# EAGLE board interstage_B2 (EAGLE 9.6.1)
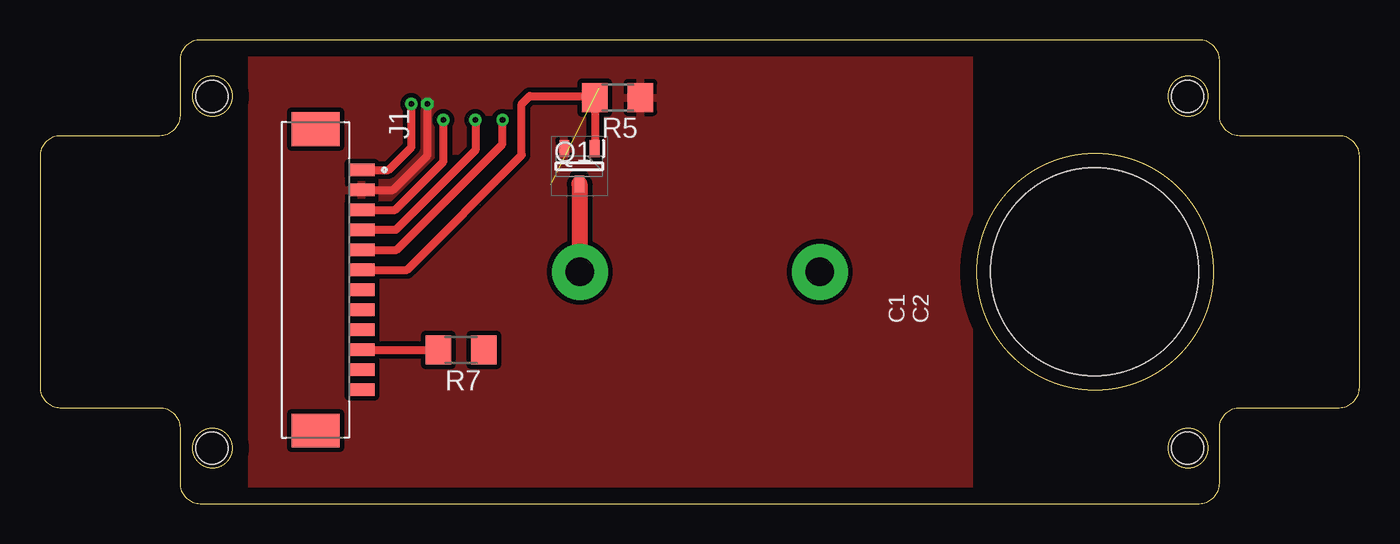
[diagram p0: board, top side]
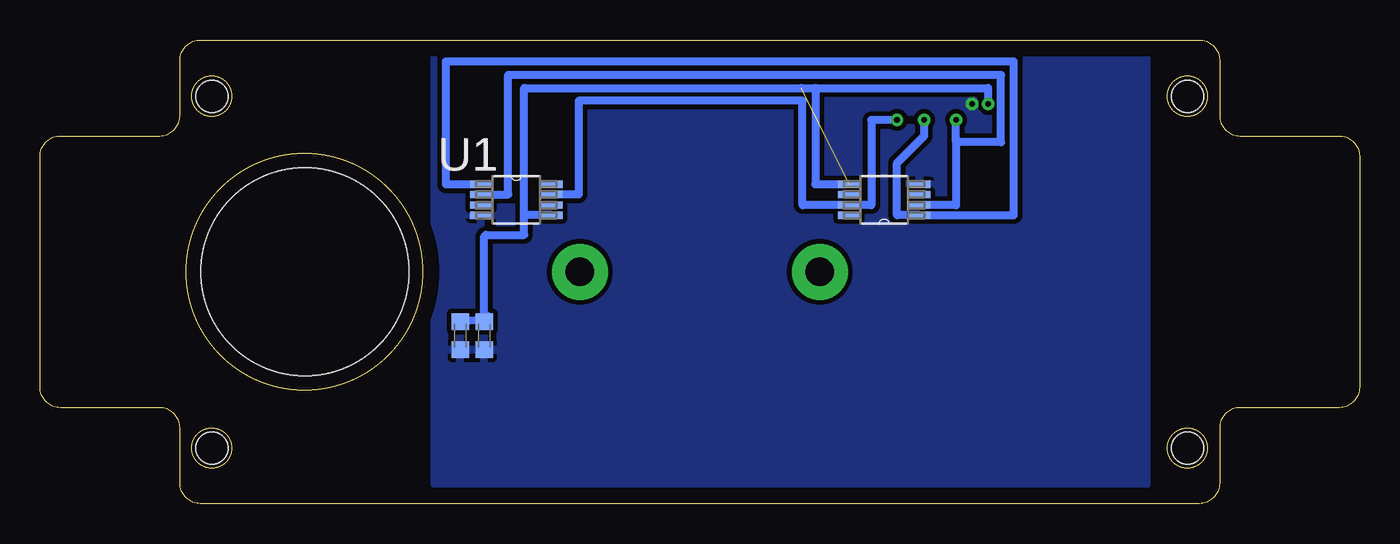
[diagram p1: board, bottom side, seen from below]

Size 82.5 x 29 mm. Coordinates in mm from the lower left corner, seen from the top.
Outline: 0,7.27 arc90 1.27,6 7.48,6 arc-90 8.75,4.73 8.75,1.27 arc90 10.02,0 72.48,0 arc90 73.75,1.27 73.75,4.73 arc-90 75.02,6 81.23,6 arc90 82.5,7.27 82.5,21.73 arc90 81.23,23 75.02,23 arc-90 73.75,24.27 73.75,27.73 arc90 72.48,29 10.02,29 arc90 8.75,27.73 8.75,24.27 arc-90 7.48,23 1.27,23 arc90 0,21.73 0,7.27
Outline: circle at 65.98,14.5 radius 7.4
Outline: circle at 71.78,25.48 radius 1.25
Outline: circle at 10.78,3.48 radius 1.25
Outline: circle at 10.78,25.48 radius 1.25
Outline: circle at 71.78,3.48 radius 1.25
Copper layers (1*16): Top 0.035mm / dielectric 1.5mm / Bottom 0.035mm
Design rules "default *": minimum track width 6mil, minimum drill 0.35mm, track to track 0.3mm, track to pad 6mil, pad to pad 6mil, via to via 6mil, smd to smd 6mil, copper to edge 40mil, drill to drill 6mil, minimum pad ring 10mil, minimum via ring 8mil, stop-mask expansion 4mil, vias tented up to drill 0mil, thermal gap 10mil
Holes 2 mm at 10.75,3.48 10.75,25.48 71.75,3.48 71.75,25.48
Holes 13 mm at 65.95,14.5

## Footprints (pad centres in the part's own frame; a part is rotated, then mirrored left to right if it is on the bottom)
C0603K = smd 1.05 x 1.08: 1 -0.875,0; 2 0.875,0
MOLEX_0532611271 = smd 0.8 x 1.6: 1 -6.875,2.9; 2 -5.625,2.9; 3 -4.375,2.9; 4 -3.125,2.9; 5 -1.875,2.9; 6 -0.625,2.9; 7 0.625,2.9; 8 1.875,2.9; 9 3.125,2.9; 10 4.375,2.9; 11 5.625,2.9; 12 6.875,2.9 | smd 2.1 x 3: S1 -9.425,0; S2 9.425,0
SOT95P230X110-3N = smd 1.05 x 0.6: 1 -1.1,0.95; 2 -1.1,-0.95; 3 1.1,0
R1206 = smd 1.6 x 1.803: 1 -1.422,0; 2 1.422,0
SOP65P490X110-8N = smd 1.372 x 0.457: 1 -2.21,0.965; 2 -2.21,0.33; 3 -2.21,-0.33; 4 -2.21,-0.965; 5 2.21,-0.965; 6 2.21,-0.33; 7 2.21,0.33; 8 2.21,0.965

## Placement (x,y rotation side)
C1  0.1pF  [C0603K]  54.72,10.5 270 bottom
C2  0.1pF  [C0603K]  56.22,10.5 270 bottom
J1  0532611271  [MOLEX_0532611271]  17.22,14 270 top
Q1  PMV16XNR  [SOT95P230X110-3N]  33.72,21.1 270 top
R5  330 Ohm  [R1206]  36.12,25.4 180 top
R7  330 Ohm  [R1206]  26.32,9.6 180 top
U1  LM70CIMM-3  [SOP65P490X110-8N]  52.72,19 0 bottom
U2  LM70CIMM-3  [SOP65P490X110-8N]  29.72,19 180 bottom

## Library data of the parts
C1 C2 = rcl; SPICEPREFIX: C
J1 = picoblade; AVAILABILITY: Unavailable; DESCRIPTION: Picoblade Connector, 12 Circuit Single Row, Right Angle Surface Mount SMT PCB; MF: Molex; MP: 0532611271; PACKAGE: None; PRICE: None
Q1 = SamacSys_Parts; DESCRIPTION: Nexperia PMV16XNR N-channel MOSFET, 8.6 A, 20 V PMV16XN, 3-Pin SOT-23; HEIGHT: 1.1mm; MANUFACTURER_NAME: Nexperia; MANUFACTURER_PART_NUMBER: PMV16XNR; MOUSER_PART_NUMBER: 771-PMV16XNR; MOUSER_PRICE-STOCK: https://www.mouser.com/Search/Refine.aspx?Keyword=771-PMV16XNR
R5 R7 = rcl; SPICEPREFIX: R
U1 U2 = LM70CIMM-3; AVAILABILITY: Unavailable; DESCRIPTION: Temperature Sensor Digital, Local -55°C ~ 150°C 10 b 8-VSSOP; MF: Texas Instruments; MP: LM70CIMM-3/NOPB; PACKAGE: MSOP-8 Texas Instruments; PRICE: None

## Nets
AIN0: J1.8
AIN1: J1.7
GND: C1.2 C2.2 J1.2 Q1.2 R5.1 U1.4 U2.4
INT0: J1.10 R7.2
MISO: J1.4 U1.1 U2.1
MOSFET: Q1.3
MOSI: J1.5 U1.7 U2.7
N$1: R7.1
OC1A: J1.6 Q1.1 R5.2
SCK: J1.3 U1.2 U2.2
T0: J1.11
T1: J1.9
VCC: C1.1 C2.1 J1.1 U1.5 U2.5

## Tracks (layer width: path | path; a pad name or v marks a point on that pad's centre or on a via)
GND  (via drill 0.35)
  Top 0.5: v24.22,25 24.22,21.78 22.07,19.62 J1.2
  pour Bottom: 13.32,28.6 13.32,1.2 57.82,1.2 57.82,28.6
  pour Top: 13.22,28.43 13.22,1.2 13.12,1.1 58.12,1.1 58.12,28.43
INT0
  Top 0.5: J1.10 24.87,9.62 R7.2
MISO  (via drill 0.35)
  Top 0.5: J1.4 22.25,17.12 27.22,22.1 v27.22,24
  Bottom 0.5: v27.22,24 27.22,23 28.92,21.3 28.92,18.04 U2.1 21.62,18.04 21.62,27.65 57.12,27.65 57.12,19.96 U1.1
MOSFET  (via drill 1.8 pad 3.5)
  Top 1: v33.75,14.5 33.75,19.88 Q1.3
MOSI  (via drill 0.35)
  Top 0.5: J1.5 22.3,15.88 28.92,22.5 v28.92,24
  Bottom 0.5: U1.7 48.82,19.33 48.82,25.2 34.82,25.2 34.82,18.67 U2.7 30.52,18.67 30.52,24 v28.92,24
N$2  (via drill 1.8 pad 3.5)
  other vias: 48.75,14.5
OC1A
  Top 0.5: J1.6 22.95,14.62 30.12,21.8 30.12,25 30.62,25.5 34.4,25.5 34.6,25.3 R5.2 34.7,22.23 Q1.1
SCK  (via drill 0.35)  (1 unrouted)
  Top 0.5: J1.3 22.2,18.38 25.22,21.4 v25.22,24
  Bottom 0.5: 25.22,22.6 v25.22,24 | 25.22,22.6 22.42,22.6 22.42,26.8 53.22,26.8 53.22,19.33 U1.2 | 25.22,22.6 25.22,18.67 U2.2
VCC  (via drill 0.35)  (1 unrouted)
  Top 0.5: v23.22,25 23.22,22.3 21.8,20.88 J1.1
  Bottom 0.5: 34.92,26 23.22,26 v23.22,25 | U2.5 34.02,19.96 34.02,26 52.22,26 52.22,18.04 | C1.1 55.02,11.47 | 55.02,11.47 C2.1 | 54.55,11.75 C1.1 | U1.5 52.22,18.04 | 52.22,18.04 52.22,16.8 54.62,16.8 54.72,16.7 C1.1 | 54.99,11.5 55.02,11.47